# Altium PCB control_pcb.PcbDoc
Units mm, origin at the board's own origin, x right, y up, seen from the top; angles counter-clockwise.
Board outline 130 x 81 mm, 2 copper layers (Top Layer, Bottom Layer); 113 components, 92 nets, 401 pads, 319 vias.
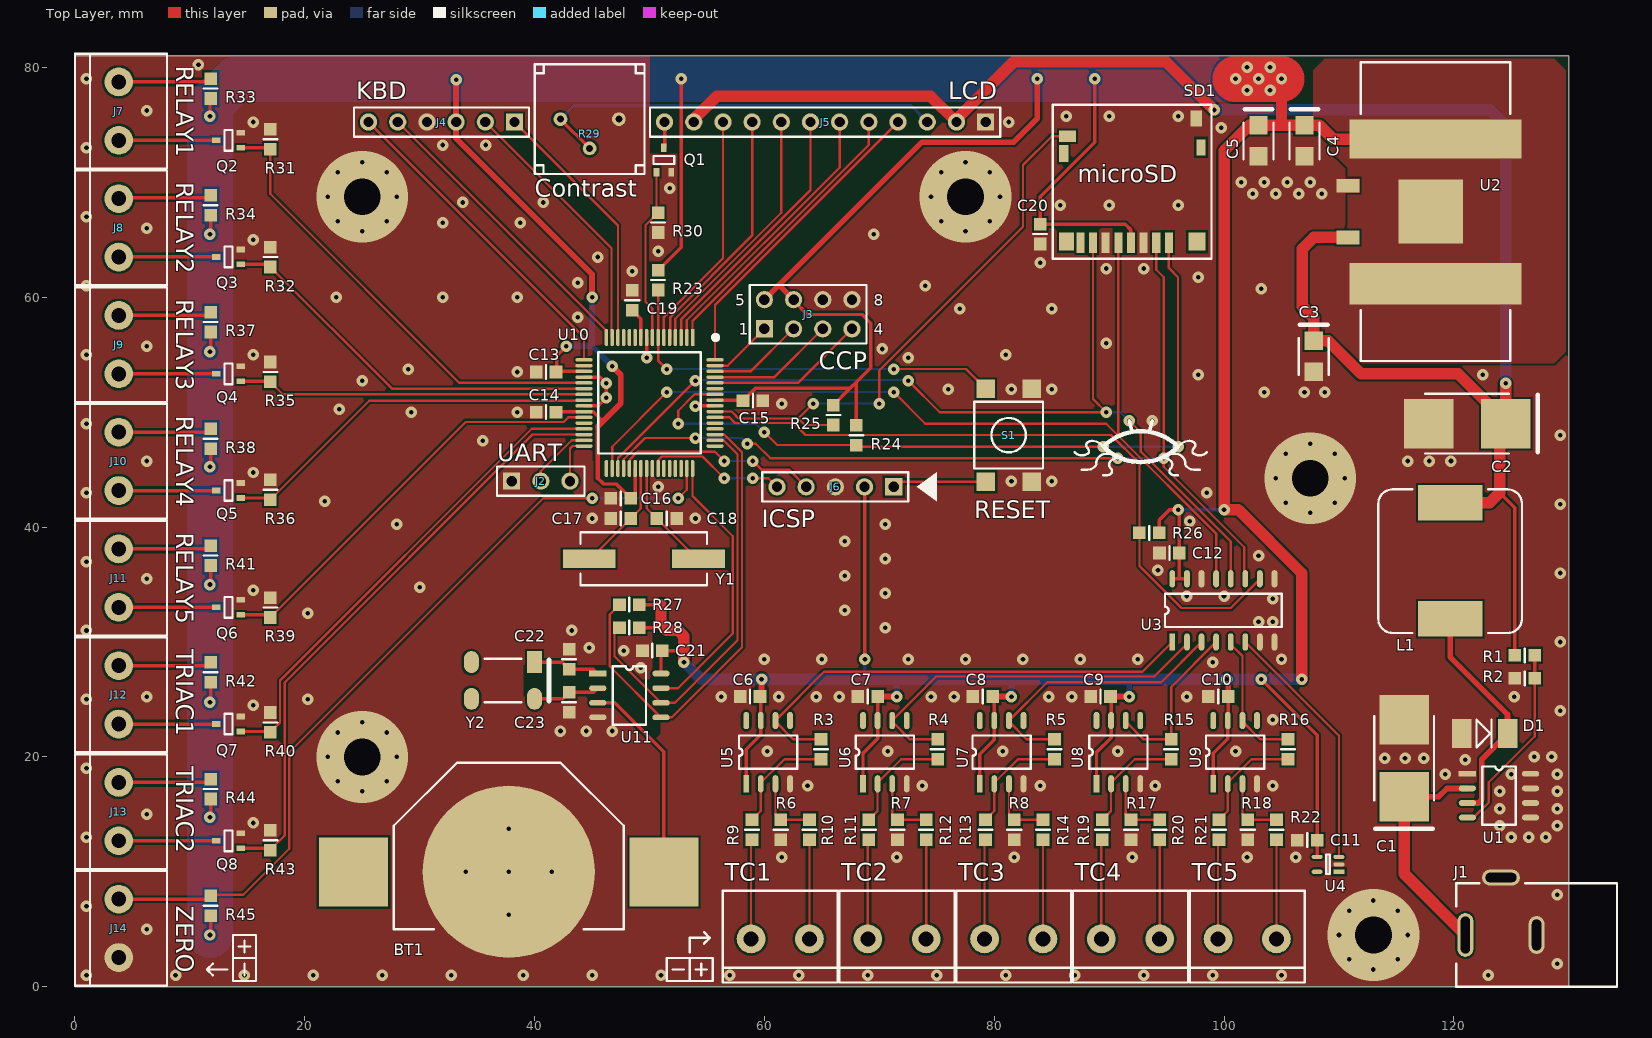
[diagram p0: Top Layer view]
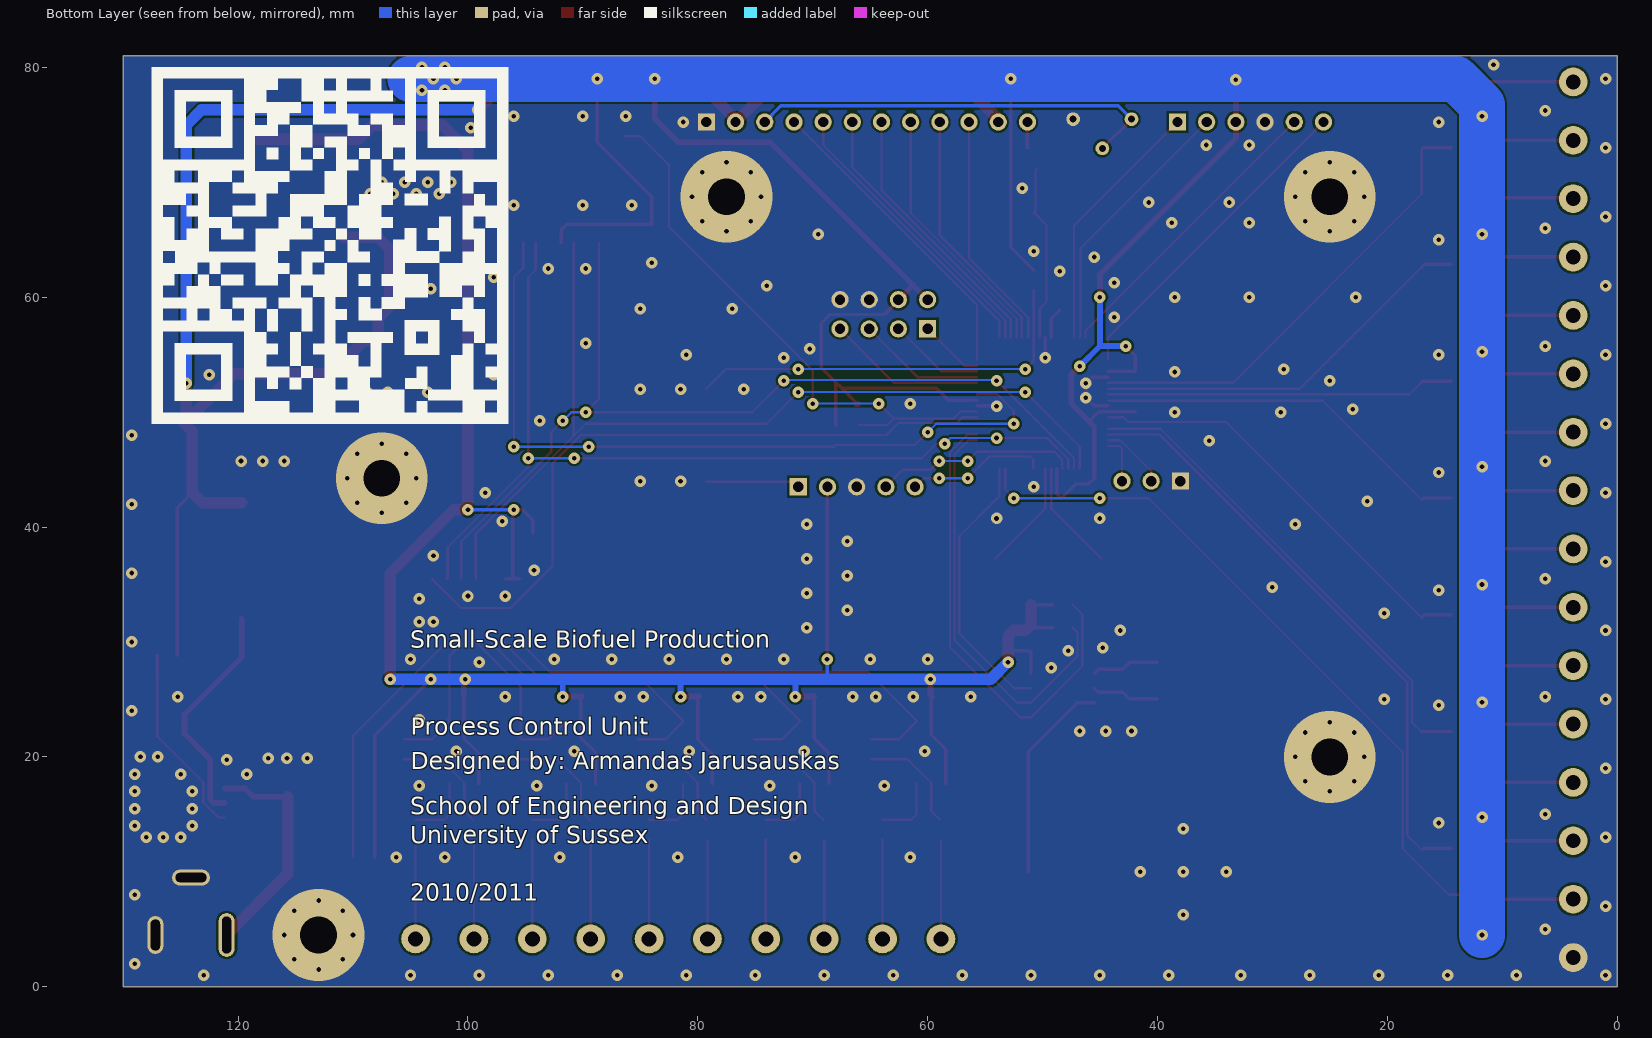
[diagram p1: Bottom Layer view, seen from below]

## Layer stack, top to bottom
Top Layer: signal copper 0.0356
Dielectric: dielectric 0.32, FR-4, Dk 4.8
Bottom Layer: signal copper 0.0356

## Board outline
0,0 0,81 130,81 130,0

## Design rules (kind name [scope] priority, off if disabled: settings)
Clearance [All] p1: gap=0.2
HoleSize [All] p1: absolutevalues=TRUE maxlimit=5 minlimit=0.4 maxpercent=80.000 minpercent=20.000
HoleToHoleClearance [All] p1: gap=0.254 allowstackedmicrovias=FALSE
MinimumAnnularRing [All] p1: minimumring=0.3
MinimumSolderMaskSliver [All] p1: minsoldermaskwidth=0.1
PolygonConnect [All] p1: connectstyle=Direct reliefconductorwidth=0.254 reliefentries=4 polygonreliefangle="90 Angle"
RoomDefinition electrical_interface [InComponentClass('electrical_interface')] p1: confinementstyle=ConfineIn formatcopy=TRUE lockcomponents=FALSE outline -0.25,81.5 -0.25,-0.25 20,-0.25 20,81.5
RoomDefinition power_supply [InComponentClass('power_supply')] p2: confinementstyle=ConfineIn formatcopy=TRUE lockcomponents=FALSE outline 99,81 99,70 105,65 105,43 111,37 111,9 115,5 115,-0.25 134.5,-0.25 134.5,81
RoomDefinition temperature_measurement [InComponentClass('temperature_measurement')] p3: confinementstyle=ConfineIn formatcopy=TRUE lockcomponents=FALSE outline 115,0 115,5 111,9 111,37 105,43 93.5,43 91.5,41 91.5,33 90.5,32 58,32 55,29 55,0
RoutingVias [All] p1: holewidth=0.4 width=1 viastyle="Through Hole" minholewidth=0.4 minwidth=1 maxholewidth=1 maxwidth=3
SilkToSilkClearance [All] p1: silktosilkclearance=0.1
SilkscreenOverComponentPads [All] p1: minsilkscreentomaskgap=0.1
SolderMaskExpansion [All] p1: expansion=0.05
Width [All] p1: maxlimit=10 minlimit=0.1 preferedwidth=0.3
23 further rules are at their usual default settings.

## Classes and differential pairs
component class electrical_interface: J7 J8 J9 J10 J11 J12 J13 J14 Q2 Q3 Q4 Q5 Q6 Q7 Q8 R31 R32 R33 R34 R35 R36 R37 R38 R39 R40 R41 R42 R43 R44 R45
component class mcu: C13 C14 C15 C16 C17 C18 C19 J2 J3 MP1 R23 R24 R25 R26 R27 R28 S1 U10 Y1
component class misc: BT1 C20 C21 C22 C23 J4 J5 J6 Q1 R29 R30 SD1 U11 Y2
component class power_supply: C1 C2 C3 C4 C5 D1 J1 L1 R1 R2 U1 U2
component class temperature_measurement: C6 C7 C8 C9 C10 C11 C12 R3 R4 R5 R6 R7 R8 R9 R10 R11 R12 R13 R14 R15 R16 R17 R18 R19 R20 R21 R22 TC1 TC2 TC3 TC4 TC5 U3 U4 U5 U6 U7 U8 U9

## Components (designator, comment, footprint, x,y, rotation, side; value= is the part's Value field where it differs from the comment)
BT1 "Battery" "Coin Cell" 51.25,10 r180 top
C1 "35V" EIA-7343 115.675,16.529 r90 top
C2 "10V" EIA-7343 124.5,49 r180 top
C3 "6.3V" EIA-3216 107.8,56.21 r270 top
C4 "6.3V" EIA-3216 107,74.96 r270 top
C5 "6.3V" EIA-3216 103,74.96 r270 top
C6 "Cap" 0603 58.75,25.25 r0 top
C7 "Cap" 0603 69,25.25 r0 top
C8 "Cap" 0603 79,25.25 r0 top
C9 "Cap" 0603 89.25,25.25 r0 top
C10 "Cap" 0603 99.5,25.25 r0 top
C11 "Cap" 0603 107.25,12.75 r0 top
C12 "Cap" 0603 95.25,37.75 r0 top
C13 "Cap" 0603 41,53.5 r0 top
C14 "Cap" 0603 41,50 r0 top
C15 "Cap" 0603 59,51 r180 top
C16 "Cap" 0603 47.5,42.5 r0 top
C17 "Cap" 0603 47.5,40.75 r0 top
C18 "Cap" 0603 51.5,40.75 r180 top
C19 "Cap" 0603 48.5,59.75 r270 top
C20 "Cap" 0603 84,65.5 r90 top
C21 "Cap" 0603 50.25,29.25 r0 top
C22 "Cap" 0603 43,28.5 r270 top
C23 "Cap" 0603 43,24.75 r90 top
D1 "Diode" "Diode (SMA)" 120.675,22.029 r0 top
J1 "12V DC" "DC Jack" 121,4.5 r0 top (schematic designator J?)
J2 "UART" HDR1X3 38,44 r0 top
J3 "CCP" HDR2X4_CEN 60,57.25 r0 top
J4 "KBD" HDR1X6 38.25,75.25 r180 top
J5 "LCD" HDR1X12 79.25,75.25 r180 top
J6 "ICSP" HDR1X5 71.25,43.5 r180 top
J7 "RELAY1" "Terminal Block" 3.81,78.74 r270 top
J8 "RELAY2" "Terminal Block" 3.81,68.58 r270 top
J9 "RELAY3" "Terminal Block" 3.81,58.42 r270 top
J10 "RELAY4" "Terminal Block" 3.81,48.26 r270 top
J11 "RELAY5" "Terminal Block" 3.81,38.1 r270 top
J12 "TRIAC1" "Terminal Block" 3.81,27.94 r270 top
J13 "TRIAC2" "Terminal Block" 3.81,17.78 r270 top
J14 "ZERO" "Terminal Block" 3.81,7.62 r270 top
L1 "Inductor" "Inductor EPCOS" 119.675,32.029 r90 top
Q1 "MOSFET-N" SOT323 51.25,73 r0 top
Q2 "MOSFET-N" SOT323 12.31,73.66 r90 top
Q3 "MOSFET-N" SOT323 12.31,63.513 r90 top
Q4 "MOSFET-N" SOT323 12.31,53.34 r90 top
Q5 "MOSFET-N" SOT323 12.31,43.18 r90 top
Q6 "MOSFET-N" SOT323 12.31,33.02 r90 top
Q7 "MOSFET-N" SOT323 12.31,22.86 r90 top
Q8 "MOSFET-N" SOT323 12.31,12.7 r90 top
R1 "1%" 0603 126.175,28.833 r180 top
R2 "1%" 0603 126.175,26.833 r0 top
R3 "0.1%" 0603 64.92,20.66 r270 top
R4 "0.1%" 0603 75.08,20.66 r270 top
R5 "0.1%" 0603 85.24,20.66 r270 top
R6 "0.1%" 0603 61.42,13.66 r90 top
R7 "0.1%" 0603 71.58,13.66 r90 top
R8 "0.1%" 0603 81.74,13.66 r90 top
R9 "0.1%" 0603 58.92,13.66 r90 top
R10 "0.1%" 0603 63.92,13.66 r90 top
R11 "0.1%" 0603 69.08,13.66 r90 top
R12 "0.1%" 0603 74.08,13.66 r90 top
R13 "0.1%" 0603 79.24,13.66 r90 top
R14 "0.1%" 0603 84.24,13.66 r90 top
R15 "0.1%" 0603 95.4,20.66 r270 top
R16 "0.1%" 0603 105.56,20.66 r270 top
R17 "0.1%" 0603 91.9,13.66 r90 top
R18 "0.1%" 0603 102.06,13.66 r90 top
R19 "0.1%" 0603 89.4,13.66 r90 top
R20 "0.1%" 0603 94.4,13.66 r90 top
R21 "0.1%" 0603 99.56,13.66 r90 top
R22 "0.1%" 0603 104.56,13.66 r90 top
R23 "Res2" 0603 50.75,61.5 r90 top
R24 "Res2" 0603 68,48 r90 top
R25 "Res2" 0603 66,49.75 r90 top
R26 "Res2" 0603 93.5,39.5 r0 top
R27 "Res2" 0603 48.25,33.25 r0 top
R28 "Res2" 0603 48.25,31.25 r0 top
R29 "Contrast" Potentiometer 42.25,75.5 r0 top
R30 "Res2" 0603 50.75,66.5 r90 top
R31 "Res2" 0603 17,73.75 r270 top
R32 "Res2" 0603 17,63.5 r270 top
R33 "Res2" 0603 11.81,78.16 r270 top
R34 "Res2" 0603 11.81,68.013 r270 top
R35 "Res2" 0603 17,53.5 r270 top
R36 "Res2" 0603 17,43.25 r270 top
R37 "Res2" 0603 11.81,57.84 r270 top
R38 "Res2" 0603 11.81,47.68 r270 top
R39 "Res2" 0603 17,33 r270 top
R40 "Res2" 0603 17,23 r270 top
R41 "Res2" 0603 11.81,37.52 r270 top
R42 "Res2" 0603 11.81,27.36 r270 top
R43 "Res2" 0603 17,12.75 r270 top
R44 "Res2" 0603 11.81,17.2 r270 top
R45 "Res2" 0603 11.81,7.04 r270 top
S1 "RESET" "Switch 2" 81.25,48 r180 top
SD1 "SDCARD" "microSD connector" 87.5,64.75 r0 top
TC1 "Terminal" "Terminal Block" 58.84,4.16 r0 top
TC2 "Terminal" "Terminal Block" 69,4.16 r0 top
TC3 "Terminal" "Terminal Block" 79.16,4.16 r0 top
TC4 "Terminal" "Terminal Block" 89.32,4.16 r0 top
TC5 "Terminal" "Terminal Block" 99.48,4.16 r0 top
U1 "MIC4680" SO-8 121.175,18.529 r0 top
U2 "AP1117" "TO252 HS" 110.8,69.71 r270 top
U3 "MCP3008" SO-16 95.5,30 r90 top
U4 "MCP9701A" SC-70 110,10 r270 top
U5 "MAX4239" SO-8 58.42,17.66 r90 top
U6 "MAX4239" SO-8 68.58,17.66 r90 top
U7 "MAX4239" SO-8 78.74,17.66 r90 top
U8 "MAX4239" SO-8 88.9,17.66 r90 top
U9 "MAX4239" SO-8 99.06,17.66 r90 top
U10 "PIC18F66K22" TQFP-64 53.75,56.5 r270 top
U11 "M41T81S" SO-8 45.5,27.25 r0 top
Y1 "16MHz" XTAL 44.75,37.25 r0 top
Y2 "32.768kHz" CM200S 40,28.25 r180 top

## Footprints (in the part's own frame and the unit in brackets; to place one, negate y for a bottom-side part, rotate by r counter-clockwise, add the part's x,y. Pads: shape width x height; smd on the part's side, far side on the other; paste and mask are expansions set on the pad)
0603 [mm]
  rect 1.1x1.1 smd: 1(-0.865,0) 2(0.865,0)
  silkscreen extent 0,-0.6 0,0.6
CM200S [mm] "Crystal oscillator package"
  oval 1.3x1.9 smd: 0(5.5,3.2) 0(5.5,0) 2(0,3.2)
  rect 1.3x1.9 smd: 1(0,0)
  silkscreen extent -1.25,-0.3 4.35,3.5
"Coin Cell" [mm] "CR2030 Coin cell retainer"
  rect 6x6 smd: 1(0,0) 1(27,0)
  round 15 smd paste-8: 2(13.5,0)
  silkscreen extent 3.5,-9.5 23.5,5
"DC Jack" [mm] "DC Jack"
  oval 1.4x3.8 hole 0.8 slot 3.2 at 90 deg: 1(0,0)
  oval 1.4x3.3 hole 0.8 slot 2.7 at 90 deg: 2(6.2,0)
  oval 3.3x1.4 hole 0.8 slot 2.7 at 0 deg: 3(3.1,5)
  silkscreen extent -0.8,-4.5 13.2,4.5
"Diode (SMA)" [mm]
  rect 1.7x2.5 smd: 1(0,0) 2(4,0)
  silkscreen extent 1.3,-1.2 2.6,1.2
EIA-3216 [mm]
  rect 1.6x1.6 smd: 1(0,0) 2(2.7,0)
  silkscreen extent -1.4,-1.3 2.95,1.3
EIA-7343 [mm]
  rect 4.3x4.3 smd: 1(0,0) 2(6.7,0)
  silkscreen extent -2.8,-2.6 7,2.6
HDR1X3 [mm] "Connector; Header; 3 Position"
  rect 1.5x1.5 hole 0.9: 1(0,0)
  round 1.5 hole 0.9: 2(2.54,0) 3(5.08,0)
  silkscreen extent -1.27,-1.27 6.35,1.27
HDR1X5 [mm] "Connector; Header; 5 Position"
  rect 1.5x1.5 hole 0.9: 1(0,0)
  round 1.5 hole 0.9: 2(2.54,0) 3(5.08,0) 4(7.62,0) 5(10.16,0)
  silkscreen extent -1.27,-1.27 11.43,1.27
HDR1X6 [mm] "Connector; Header; 6 Position"
  rect 1.5x1.5 hole 0.9: 1(0,0)
  round 1.5 hole 0.9: 2(2.54,0) 3(5.08,0) 4(7.62,0) 5(10.16,0) 6(12.7,0)
  silkscreen extent -1.27,-1.27 13.97,1.27
HDR1X12 [mm] "Connector; Header; 12 Position"
  rect 1.5x1.5 hole 0.9: 1(0,0)
  round 1.5 hole 0.9: 2(2.54,0) 3(5.08,0) 4(7.62,0) 5(10.16,0) 6(12.7,0) 7(15.24,0) 8(17.78,0) 9(20.32,0) 10(22.86,0) 11(25.4,0) 12(27.94,0)
  silkscreen extent -1.27,-1.27 29.21,1.27
HDR2X4_CEN [mm] "Connector; Header; 4x2 Position"
  rect 1.5x1.5 hole 0.9: 1(0,0)
  round 1.5 hole 0.9: 2(2.54,0) 3(5.08,0) 4(7.62,0) 5(0,2.54) 6(2.54,2.54) 7(5.08,2.54) 8(7.62,2.54)
  silkscreen extent -1.27,-1.27 8.89,3.81
"Inductor EPCOS" [mm]
  rect 3.1x5.6 smd: 1(0,0) 2(10.1,0)
  silkscreen extent -1.25,-6.25 11.25,6.25
"microSD connector" [mm] "Push-pull microSD card connector"
  rect 0.8x1.5 smd: 0(-1.45,7.75)
  rect 1.3x1.6 smd: 0(-1.2,0.1)
  rect 1.5x1.6 smd: 0(10.15,0.1)
  rect 0.8x1.4 smd: 0(10.5,8.3)
  rect 0.7x1.8 smd: 1(7.7,0) 2(6.6,0) 3(5.5,0) 4(4.4,0) 5(3.3,0) 6(2.2,0) 7(1.1,0) 8(0,0)
  rect 1.45x1 smd: 9(-1.125,9.25)
  rect 1x1.4 smd: 10(10.1,10.8)
  silkscreen extent -2.4,-1.4 11.4,12
Potentiometer [mm] "Trimmer pot"
  round 1.2 hole 0.6: 1(0,0) 2(5.08,0) 3(2.54,-2.54)
  silkscreen extent -2.24,-4.78 7.32,4.78
SC-70 [mm]
  rect 0.36x0.95 smd: 1(0,0)
  oval 0.36x0.95 smd: 2(-0.65,0) 3(-1.3,0) 4(-1.3,-1.9) 5(0,-1.9)
  silkscreen extent -1.5,-1.1 0.2,-0.8
SO-8 [mm] "8-pin Small Outline Package"
  rect 1.5x0.5 smd: 1(0,0)
  oval 1.5x0.5 smd: 2(0,-1.27) 3(0,-2.54) 4(0,-3.81) 5(5.5,-3.81) 6(5.5,-2.54) 7(5.5,-1.27) 8(5.5,0)
  silkscreen extent 1.3,-4.44 4.2,0.64
SO-16 [mm] "16-pin Small Outline Package"
  rect 1.5x0.5 smd: 1(0,0)
  oval 1.5x0.5 smd: 2(0,-1.27) 3(0,-2.54) 4(0,-3.81) 5(0,-5.08) 6(0,-6.35) 7(0,-7.62) 8(0,-8.89) 9(5.5,-8.89) 10(5.5,-7.62) 11(5.5,-6.35) 12(5.5,-5.08) 13(5.5,-3.81) 14(5.5,-2.54) 15(5.5,-1.27) 16(5.5,0)
  silkscreen extent 1.3,-9.53 4.2,0.64
SOT323 [mm]
  rect 0.5x0.74 smd: 1(0,0) 2(-0.65,-2.1) 3(0.65,-2.1)
  silkscreen extent -0.9,-1.4 0.9,-0.7
"Switch 2" [mm] "Tactile Switch"
  rect 1.6x1.6 smd: 1(-2,4.05) 1(-2,-4.05) 2(2,4.05) 2(2,-4.05)
  silkscreen extent -3,-2.9 3,2.9
"Terminal Block" [mm] "Terminal Block"
  round 2.5 hole 1.3: 1(0,0) 2(5.08,0)
  silkscreen extent -2.46,-3.8 7.54,4.2
"TO252 HS" [mm] "TO252 wth a surface mount heatsink"
  rect 3.4x15 smd: 0(-4.05,7.6)
  rect 3.6x15 smd: 0(8.55,7.6)
  rect 1.2x2 smd: 1(0,0) 3(4.5,0)
  rect 5.6x5.6 smd paste-0.5: 2(2.25,7.2)
  silkscreen extent -10.75,1.1 15.25,14.1
TQFP-64 [mm]
  rect 1.5x0.3 smd: 1(0,0)
  oval 1.5x0.3 smd: 2(0,-0.5) 3(0,-1) 4(0,-1.5) 5(0,-2) 6(0,-2.5) 7(0,-3) 8(0,-3.5) 9(0,-4) 10(0,-4.5) 11(0,-5) 12(0,-5.5) 13(0,-6) 14(0,-6.5) 15(0,-7) 16(0,-7.5) 33(11.4,-7.5) 34(11.4,-7) 35(11.4,-6.5) 36(11.4,-6) 37(11.4,-5.5) 38(11.4,-5) 39(11.4,-4.5) 40(11.4,-4) 41(11.4,-3.5) 42(11.4,-3) 43(11.4,-2.5) 44(11.4,-2) 45(11.4,-1.5) 46(11.4,-1) 47(11.4,-0.5) 48(11.4,0)
  oval 0.3x1.5 smd: 17(1.95,-9.45) 18(2.45,-9.45) 19(2.95,-9.45) 20(3.45,-9.45) 21(3.95,-9.45) 22(4.45,-9.45) 23(4.95,-9.45) 24(5.45,-9.45) 25(5.95,-9.45) 26(6.45,-9.45) 27(6.95,-9.45) 28(7.45,-9.45) 29(7.95,-9.45) 30(8.45,-9.45) 31(8.95,-9.45) 32(9.45,-9.45) 49(9.45,1.95) 50(8.95,1.95) 51(8.45,1.95) 52(7.95,1.95) 53(7.45,1.95) 54(6.95,1.95) 55(6.45,1.95) 56(5.95,1.95) 57(5.45,1.95) 58(4.95,1.95) 59(4.45,1.95) 60(3.95,1.95) 61(3.45,1.95) 62(2.95,1.95) 63(2.45,1.95) 64(1.95,1.95)
  silkscreen extent -0.2,-8.2 10.1,2.2
XTAL [mm] "Low-profile SMD crystal"
  rect 4.6x1.6 smd: 1(0,0) 2(9.5,0)
  silkscreen extent -0.75,-2.3 10.25,2.3

## Part data
BT1: "Multicell Battery"
C1 C2 C3 C4 C5: library part "Cap Pol2", "Polarized Capacitor (Axial)"
C6 C7 C8 C9 C10 C11 C12 C13 C14 C15 C16 C17 C18 C19 C20 C21 C22 C23: "Capacitor"
D1: "Default Diode"
J1: library part PWR2.5, "Low Voltage Power Supply Connector"
J2: library part "Header 3", "Header, 3-Pin"
J3: library part "Header 4X2A", "Header, 4-Pin, Dual row"
J4: library part "Header 6", "Header, 6-Pin"
J5: library part "Header 12", "Header, 12-Pin"
J6: library part "Header 5", "Header, 5-Pin"
J7 J8 J9 J10 J11 J12 J13 J14 TC1 TC2 TC3 TC4 TC5: library part "Header 2", "Header, 2-Pin"
Q1 Q2 Q3 Q4 Q5 Q6 Q7 Q8: "N-Channel MOSFET"
R1 R2 R3 R4 R5 R6 R7 R8 R9 R10 R11 R12 R13 R14 R15 R16 R17 R18 R19 R20 R21 R22: library part Res2, "Resistor"
R23 R24 R25 R26 R27 R28 R30 R31 R32 R33 R34 R35 R36 R37 R38 R39 R40 R41 R42 R43 R44 R45: "Resistor"
R29: library part RPot, "Potentiometer"
S1: library part SW-PB, "Switch"
SD1: library part "SD Card", "SD Card, SPI interface"
U1: "1A 200kHz Buck Regulator"
U2: "Low Dropout Regulator"
U3: "ADC 8-channel 10-bit"
U4: "Low-Power Linear Active Thermistor"
U5 U6 U7 U8 U9: "Ultra-Low Offset/Drift, Low-Noise,  Precision SOT23 Amplifiers"
U10: "PIC microcontroller"
U11: "Serial access real-time clock with alarms"
Y1 Y2: library part XTAL, "Crystal Oscillator"

## Via types
v1: diameter 1, hole 0.4, Top Layer to Bottom Layer, tented both sides, 267 vias
v2: diameter 1, hole 0.4, Top Layer to Bottom Layer, 40 vias
v3: diameter 1, hole 0.4, Top Layer to Bottom Layer, tented bottom, 7 vias
v4: diameter 8, hole 3.2, Top Layer to Bottom Layer, 5 vias

## Nets (pads, with @x,y where several pads share a name; then routed paths per layer and width w, separated by ;. In a path a pad name is that pad's centre, name@x,y a point inside that pad or via, vN(x,y) a via of type N, cw(c..) or ccw(c..) an arc to the next point about the centre after c; other vN are vias at no path point)
3V3: C4.1 C5.1 C6.2 C7.2 C8.2 C9.2 C10.2 C11.2 C12.2 C13.2 C14.2 C15.2 C16.2 C20.2 C21.2 J3.5 J3.6 J4.3 J6.2 R23.2 R24.2 R25.2 R26.2 R27.2 R28.2 R33.2 R34.2 R37.2 R38.2 R41.2 R42.2 R44.2 R45.2 SD1.4 U2.0 U2.2 U3.15 U3.16 U4.4 U5.1 U5.7 U6.1 U6.7 U7.1 U7.7 U8.1 U8.7 U9.1 U9.7 U10.19 U10.26 U10.38 U10.57 U11.8 | length 603.8
  Top Layer w0.3: v1(11.75,75.75) R33.2@11.75,77.235 ; v1@11.81,4.56 R45.2 ; v1@11.81,14.81 R44.2 ; v1@11.81,24.81 R42.2 ; v1@11.81,35.06 R41.2 ; v1@11.81,45.31 R38.2 ; v1@11.81,55.31 R37.2 ; v1@11.81,65.56 R34.2 ; C14.2@41.915,50.05 U10.26 45.107,50.05 45.935,49.222 45.935,49.185 ; v1(42.75,55.75) 41.915,54.915 41.915,53.55 U10.19 ; 45.5,44.25 46,43.75 47.115,43.75 C16.2 48.75,42.885 U10.38 ; R28.2 50.75,31.25 51,31.5 ; R27.2 51,33.25 ; R23.2 52.75,64.365 v1(52.75,79) ; U11.8 51,29.135 C21.2 53,29.25 ; U10.57 C15.2@58.085,51.05 ; C15.2 59.235,52.1 67.485,52.1 ; U5.1 58.42,20.67 59.69,21.94 U5.7 59.69,25.175 C6.2 ; J3.6 62.54,59.71 63.75,58.5 68.5,58.5 69.25,57.75 69.25,53.865 68,52.615 ; R25.2@66,50.824 R25.2 ; R25.2@66.25,50.615 R25.2 ; R24.2 68,52.615 ; U6.1 68.58,20.33 69.85,21.6 U6.7 69.865,23.175 C7.2 ; J6.2 68.75,43.46 v1(68.75,28.5) ; U7.1 78.74,20.24 80,21.5 80,23.15 80,25.115 C8.2 ; v1(88.75,79) 88.75,73.5 84,68.75 C20.2 91.385,66.365 91.9,65.85 SD1.4 ; U8.1 88.9,20.4 90.17,21.67 U8.7 90.17,25.195 C9.2 ; R26.2 94.365,40.615 95.25,41.5 v1(96,41.5) ; U3.16 96.126,35.5 ; v1@96.115,41.385 C12.2 96.115,35.511 96.126,35.5 ; U3.15 96.126,35.5 ; U9.1 99.06,20.31 100.33,21.58 U9.7 100.365,23.195 C10.2 ; 100,78 v1(101,79) ; v1(103.25,26.75) 108.115,21.885 C11.2 108.115,11.315 U4.4 ; R25.2 67.485,52.1 ; 67.485,52.1 68,52.615
  Top Layer w0.4: 45.5,44.25 45.5,48.75 ; U7.7@80,23.15 U7.7
  Top Layer w0.5: v1(33.17,78.92) J4.3 33.17,73.83 45,62 v1(45,60) ; 45.5,48.75 45.935,49.185 47.5,50.75 47.5,53.25 v1(46.75,54) ; C6.2 59.75,25.385 v1(59.75,26.75) v1@59.615,26.615 ; J3.5 61.269,61.059 ; J3.6 61.271,61.059 61.269,61.059 ; C7.2 v1(71.5,25.25) ; C8.2 v1(81.5,25.25) ; v1(83.75,79) 83.75,75.553 81.697,73.5 73.71,73.5 61.269,61.059 ; C9.2 v1(91.75,25.25) ; v1(100.25,26.75) 100.365,26.635 C10.2
  Top Layer w1: 51,33.25 51,31.5 51.5,31 52.5,31 53,30.5 53,29.25 v1(53,28.25) ; v1(105,79) 105,74.96 ; v1(106.75,26.75) 106.75,36 101.25,41.5 v1(100,41.5) 100,72.75 102.21,74.96 C5.1 105,74.96 ; U2.0@111.7,73.76 U2.0@118.4,73.76 ; U2.0@118.39,73.75 109.5,73.75 108.29,74.96 C4.1 105,74.96
  Top Layer w4: v1(101,79) v1(105,79)
  Bottom Layer w0.3: 68.75,26.75 v1(68.75,28.5) ; v1(96,41.5) v1(100,41.5)
  Bottom Layer w0.5: v1(42.75,55.75) 45,55.75 ; v1(45,60) 45,55.75 ; v1(46.75,54) 45,55.75 ; v1(71.5,25.25) 71.5,26.75 ; v1(81.5,25.25) 81.5,26.75 ; v1(91.75,25.25) 91.75,26.75
  Bottom Layer w1: v1(53,28.25) 54.5,26.75 v1(59.75,26.75) 68.75,26.75 71.5,26.75 81.5,26.75 91.75,26.75 v1(100.25,26.75) v1(103.25,26.75) v1(106.75,26.75)
  Bottom Layer w4: v1(11.75,4.5) 11.75,76.75 14,79 v1(105,79)
  other v1: 11.75,14.75 11.75,24.75 11.75,35 11.75,45.25 11.75,55.25 11.75,65.5 102,78 104,78 103,79 102,80 104,80
5V: C2.1 C3.1 J5.2 J5.11 L1.2 R1.2 U2.3 | length 161.2
  Top Layer w0.3: 124,43 125.31,41.69 R1.2
  Top Layer w1: J5.11@53.85,75.5 55.85,77.5 74.46,77.5 J5.2 76.71,75.5 81.71,80.5 94.95,80.5 v1(99.15,76.3) ; U2.3 107.8,65.21 106.8,64.21 106.8,59.21 107.8,58.21 C3.1 109.05,56.21 111.92,53.34 120.364,53.34 C2.1@124.5,49.204 ; L1.2 123.129,42.129 124,43 124,48.354 124.675,49.029 C2.1@124.5,49.204 ; v1(124.5,52.5) C2.1@124.5,49.204
  Bottom Layer w1: v1(99.15,76.3) 123.2,76.3 124.5,75 v1(124.5,52.5)
BACKLIGHT-: J5.12 Q1.1 | length 2.3
  Top Layer w0.3: Q1.1 51.31,73.06 J5.12
CONTRAST: J5.3 R29.1 R29.3 | length 36.6
  Top Layer w0.3: R29.1 R29.3
  Bottom Layer w0.3: R29.1 43.4,76.65 72.77,76.65 J5.3
GND: BT1.2 C1.2 C2.2 C3.2 C4.2 C5.2 C6.1 C7.1 C8.1 C9.1 C10.1 C11.1 C12.1 C13.1 C14.1 C15.1 C16.1 C17.1 C18.1 C19.1 C20.1 C21.1 C22.1 C23.1 D1.1 J1.2 J1.3 J2.1 J3.7 J3.8 J4.4 J5.1 J6.3 J14.2 Q1.3 Q2.3 Q3.3 Q4.3 Q5.3 Q6.3 Q7.3 Q8.3 R2.1 R6.1 R7.1 R8.1 R17.1 R18.1 R29.2 R30.1 R31.1 R32.1 R35.1 R36.1 R39.1 R40.1 R43.1 S1.1 SD1.3 SD1.6 SD1.10 U1.1 U1.5 U1.6 U1.7 U1.8 U2.1 U3.7 U3.8 U3.9 U3.14 U4.2 U5.4 U6.4 U7.4 U8.4 U9.4 U10.9 U10.18 U10.20 U10.25 U10.41 U10.56 U11.4 | length 9.1
  Top Layer w0.3: U10.25 45.55,50.55 v1(46.25,51.25) v1(46.25,52.5) 45.7,53.05 U10.20 ; v1(49.75,54.75) U10.9 ; v1(54,50.5) 54.05,50.55 U10.56
  other v1: 1,1 8.75,1 14.75,1 20.75,1 26.75,1 32.75,1 39,1 45,1 51,1 57,1 63,1 69,1 75,1 81,1 87,1 93,1 99,1 105,1 123,1 129,2 6.25,5 1,7 129,8 61.5,11.25 71.5,11.25 81.75,11.25 92,11.25 102,11.25 106.25,11.25 1,13 125,13 126.5,13 128,13 124,14 129,14 15.5,14.25 6.25,15 124,15.5 129,15.5 124,17 129,17 63.75,17.5 73.75,17.5 84,17.5 94,17.5 104.25,17.5 119.25,18.5 125,18.5 129,18.5 1,19 121,19.75 114,19.875 115.75,19.875 117.375,19.875 127,20 128.5,20 60.25,20.5 70.75,20.5 80.75,20.5 90.75,20.5 101,20.5 42.25,22.25 44.5,22.25 46.75,22.25 104.25,23.25 129.25,24 15.5,24.5 1,25 20.25,25 6.25,25.25 56.25,25.25 61.25,25.25 64.5,25.25 66.5,25.25 74.5,25.25 76.5,25.25 84.75,25.25 86.75,25.25 96.75,25.25 125.25,25.25 49.25,27.75 99,28.25 60,28.5 65,28.5 72.5,28.5 77.5,28.5 82.5,28.5 87.5,28.5 92.5,28.5 105,28.5 47.75,29.25 44.75,29.5 129.25,30 1,31 43.25,31 70.5,31.25 103,31.75 104.25,31.75 20.25,32.5 67,32.75 104.25,33.75 96.75,34 100,34 70.5,34.25 15.5,34.5 30,34.75 6.25,35.5 67,35.75 129.25,36 94.25,36.25 1,37 70.5,37.25 103,37.5 67,38.75 28,40.25 70.5,40.25 97,40.5 45,40.75 54,40.75 129.25,42 21.75,42.25 1,43 98.5,43 50.75,43.5 81.5,44 85,44 15.5,44.75 6.25,45.75 116,45.75 117.875,45.75 119.75,45.75 35.5,47.5 129.25,48 1,49 29.25,50 38.5,50 23,50.25 61.5,50.75 103.5,51.75 107,51.75 108.75,51.75 76,52 81.5,52 85,52 25,52.75 97.75,53.25 122.5,53.25 38.5,53.5 29,53.75 72.5,54.75 1,55 15.5,55 81,55 70.25,55.5 6.25,55.75 89.75,56 43.75,58.25 77,59 85,59 22.75,60 32,60 38.5,60 103.25,60.75 1,61 74,61 43.75,61.25 97.75,61.75 48.5,62.25 89.75,62.5 93,62.5 84,63 45.5,63.5 50.75,64 15.5,65 69.5,65.5 6.25,66 32,66.5 38.75,66.5 1,67 85.75,68 90,68 96,68 33.75,68.25 40.75,68.25 102.5,69 104.5,69 106.5,69 108.5,69 51.75,69.5 101.5,70 103.5,70 105.5,70 107.5,70 1,73 32,73.25 35.75,73.25 99.75,74.75 15.5,75.25 81.25,75.25 86.25,75.75 90,75.75 96,75.75 6.25,76.25 1,79 10.75,80.25
  other v2: 113,1.5 110.88,2.38 115.12,2.38 110,4.5 116,4.5 110.88,6.62 115.12,6.62 113,7.5 25,17 22.88,17.88 27.12,17.88 22,20 28,20 22.88,22.12 27.12,22.12 25,23 107.5,41.25 105.38,42.13 109.62,42.13 104.5,44.25 110.5,44.25 105.38,46.37 109.62,46.37 107.5,47.25 25,65.75 77.5,65.75 22.88,66.63 27.12,66.63 75.38,66.63 79.62,66.63 22,68.75 28,68.75 74.5,68.75 80.5,68.75 22.88,70.87 27.12,70.87 75.38,70.87 79.62,70.87 25,71.75 77.5,71.75
  other v3: 37.75,6.25 34,10 37.75,10 41.5,10 37.75,13.75 93.75,49.25
  other v4: 113,4.5 25,20 107.5,44.25 25,68.75 77.5,68.75
NetC1_1: C1.1 J1.1 U1.2 | length 20
  Top Layer w0.5: C1.1 118.675,16.529 119.405,17.259 U1.2
  Top Layer w1: C1.1 115.675,9.825 J1.1
NetC17_2: C17.2 U10.39 Y1.1 | length 9.7
  Top Layer w0.2: Y1.1@44.865,37.25 C17.2 49.25,41.635 U10.39
NetC18_2: C18.2 U10.40 Y1.2 | length 9.7
  Top Layer w0.2: U10.40 49.75,41.635 C18.2 Y1.2@54.135,37.25
NetC19_2: C19.2 U10.10 | length 2.7
  Top Layer w0.3: C19.2 49.25,58.135 U10.10
NetD1_2: D1.2 L1.1 U1.3 | length 20.1
  Top Layer w0.5: L1.1 119.675,28.691 124.675,23.691 D1.2 122.429,19.783 122.429,16.283 122.135,15.989 U1.3
NetJ2_2: J2.2 U10.31 | length 5.7
  Top Layer w0.2: J2.2 40.54,44.856 43.234,47.55 U10.31
NetJ2_3: J2.3 U10.32 | length 4.1
  Top Layer w0.2: J2.3 43.08,46.83 43.3,47.05 U10.32
NetJ3_1: J3.1 U10.63 | length 5.6
  Top Layer w0.2: U10.63 56.8,54.05 J3.1
NetJ3_2: J3.2 U10.62 | length 8.4
  Top Layer w0.2: U10.62 58.8,53.55 62.5,57.25 J3.2
NetJ3_3: J3.3 U10.61 | length 11.1
  Top Layer w0.2: U10.61 60.88,53.05 J3.3
NetJ3_4: J3.4 U10.60 | length 13.9
  Top Layer w0.2: U10.60 62.92,52.55 J3.4
NetJ4_1: J4.1 U10.14 | length 22.5
  Top Layer w0.2: J4.1 47.25,66.25 U10.14
NetJ4_2: J4.2 U10.15 | length 23.3
  Top Layer w0.2: J4.2 46.7,64.26 46.7,56.55 U10.15
NetJ4_5: J4.5 U10.16 | length 26.3
  Top Layer w0.2: J4.5 46.25,57.09 U10.16
NetJ4_6: J4.6 U10.17 | length 28.5
  Top Layer w0.2: J4.6 44.3,56.5 U10.17
NetJ5_4: J5.4 U10.64 | length 27.3
  Top Layer w0.2: U10.64 55.7,59.32 J5.4
NetJ5_5: J5.5 U10.1 | length 25.1
  Top Layer w0.2: U10.1 53.75,57.936 69.09,73.276 J5.5
NetJ5_6: J5.6 U10.2 | length 24.3
  Top Layer w0.2: U10.2 53.25,58.001 66.55,71.301 J5.6
NetJ5_7: J5.7 U10.3 | length 23.4
  Top Layer w0.2: U10.3 52.75,58.067 64.01,69.327 J5.7
NetJ5_8: J5.8 U10.4 | length 22.6
  Top Layer w0.2: U10.4 52.25,58.133 61.47,67.353 J5.8
NetJ5_9: J5.9 U10.5 | length 21.7
  Top Layer w0.2: U10.5 51.8,56.55 51.8,58.248 58.93,65.378 J5.9
NetJ5_10: J5.10 U10.6 | length 20.9
  Top Layer w0.2: U10.6 51.25,58.264 56.39,63.404 J5.10
NetJ6_1: J6.1 R23.1 S1.2 U10.7 | length 43.8
  Top Layer w0.2: R23.1 U10.7 50.75,54.5 v1(51.5,53.75) ; J6.1 71.7,43.95 S1.2@79.25,43.95 ; v1(71.25,53.75) 77.55,53.75 S1.2@79.25,52.05
  Bottom Layer w0.2: v1(51.5,53.75) v1(71.25,53.75)
NetJ6_4: J6.4 U10.37 | length 17.7
  Top Layer w0.2: U10.37 48.3,45.15 48.3,45.886 48.964,46.55 55.7,46.55 v1(56.5,45.75) ; v1(59,45.75) 59.75,45 62.13,45 J6.4
  Bottom Layer w0.2: v1(56.5,45.75) v1(59,45.75)
NetJ6_5: J6.5 U10.42 | length 12.3
  Top Layer w0.2: U10.42 50.8,45.15 50.8,45.886 51.064,46.15 54.6,46.15 v1(56.5,44.25) ; v1(59,44.25) 60.34,44.25 J6.5
  Bottom Layer w0.2: v1(56.5,44.25) v1(59,44.25)
NetJ7_1: J7.1 R33.1 | length 8.1
  Top Layer w0.3: J7.1 11.525,78.74 R33.1
NetJ7_2: J7.2 Q2.1 | length 8.5
  Top Layer w0.3: J7.2 Q2.1
NetJ8_1: J8.1 R34.1 | length 8.1
  Top Layer w0.3: J8.1@3.62,68.673 R34.1@11.322,68.673 ; R34.1@11.512,68.58 R34.1
NetJ8_2: J8.2 Q3.1 | length 8.5
  Top Layer w0.3: J8.2@3.823,63.513 Q3.1
NetJ9_1: J9.1 R37.1 | length 8.1
  Top Layer w0.3: J9.1 11.525,58.42 R37.1
NetJ9_2: J9.2 Q4.1 | length 8.5
  Top Layer w0.3: J9.2 Q4.1
NetJ10_1: J10.1 R38.1 | length 8.1
  Top Layer w0.3: J10.1 11.525,48.26 R38.1
NetJ10_2: J10.2 Q5.1 | length 8.5
  Top Layer w0.3: J10.2 Q5.1
NetJ11_1: J11.1 R41.1 | length 8.1
  Top Layer w0.3: J11.1 11.525,38.1 R41.1
NetJ11_2: J11.2 Q6.1 | length 8.5
  Top Layer w0.3: J11.2 Q6.1
NetJ12_1: J12.1 R42.1 | length 8.1
  Top Layer w0.3: J12.1 11.525,27.94 R42.1
NetJ12_2: J12.2 Q7.1 | length 8.5
  Top Layer w0.3: J12.2 Q7.1
NetJ13_1: J13.1 R44.1 | length 8.1
  Top Layer w0.3: J13.1 11.525,17.78 R44.1
NetJ13_2: J13.2 Q8.1 | length 8.5
  Top Layer w0.3: J13.2 Q8.1
NetJ14_1: J14.1 R45.1 U10.47 | length 71.1
  Top Layer w0.2: R45.1 11.905,8 14.639,8 18.65,12.011 18.65,20.4 40.75,42.5 v1(45,42.5) ; v1(52.5,42.5) 53.25,43.25 U10.47 ; U10.47@53.2,45.05 U10.47 ; U10.47@53.3,45.05 U10.47
  Top Layer w0.3: J14.1 11.525,7.62 R45.1
  Bottom Layer w0.2: v1(45,42.5) v1(52.5,42.5)
NetQ1_2: Q1.2 R30.2 U10.8 | length 15.3
  Top Layer w0.2: U10.8 50.25,59 49.65,59.6 49.65,66.265 R30.2 50.6,67.515 Q1.2 ; Q1.2@50.5,71.05 Q1.2@50.6,71.15
NetQ2_2: Q2.2 R31.2 U10.21 | length 40.5
  Top Layer w0.2: R31.2 17,69 33.45,52.55 U10.21
  Top Layer w0.3: Q2.2 R31.2@16.875,73.01
NetQ3_2: Q3.2 R32.2 U10.22 | length 34.4
  Top Layer w0.2: R32.2 27.585,52.05 U10.22
  Top Layer w0.3: Q3.2 16.772,62.863 R32.2
NetQ4_2: Q4.2 R35.2 U10.23 | length 30.3
  Top Layer w0.2: R35.2 18.085,51.55 U10.23
  Top Layer w0.3: Q4.2 R35.2@16.945,52.69
NetQ5_2: Q5.2 R36.2 U10.24 | length 33.3
  Top Layer w0.2: R36.2 25.615,51 U10.24@44.25,51
  Top Layer w0.3: Q5.2 R36.2@16.855,42.53
NetQ6_2: Q6.2 R39.2 U10.27 | length 37.2
  Top Layer w0.2: R39.2 34.015,49.15 42.539,49.15 42.939,49.55 U10.27
  Top Layer w0.3: Q6.2 16.765,32.37 R39.2
NetQ7_2: Q7.2 R40.2 U10.29 | length 42.9
  Top Layer w0.2: R40.2 17.85,22.985 17.85,26.64 39.76,48.55 U10.29
  Top Layer w0.3: Q7.2 R40.2@16.925,22.21
NetQ8_2: Q8.2 R43.2 U10.30 | length 52.5
  Top Layer w0.2: R43.2@17,11.915 18.25,13.165 18.25,26.474 39.826,48.05 U10.30
  Top Layer w0.3: Q8.2 R43.2@16.835,12.05
NetR1_1: R1.1 R2.2 U1.4 | length 16.9
  Top Layer w0.2: U1.4 121.719,14.719 123.033,16.033 123.033,17.787 127.04,21.794 R2.2
  Top Layer w0.3: R2.2 R1.1
NetR3_2: R3.2 R9.2 U5.2 | length 9.5
  Top Layer w0.2: R9.2 59.69,15.295 U5.2 ; U5.2@59.69,17.744 61.741,19.795 R3.2
NetR4_2: R4.2 R11.2 U6.2 | length 9.5
  Top Layer w0.2: R11.2 69.85,15.295 U6.2 ; U6.2@69.85,17.744 71.901,19.795 R4.2
NetR5_2: R5.2 R13.2 U7.2 | length 9.5
  Top Layer w0.2: R13.2 80.01,15.295 U7.2 ; U7.2@80.01,17.744 82.061,19.795 R5.2
NetR6_2: R6.2 R10.2 U5.3 | length 5.8
  Top Layer w0.2: U5.3 60.96,14.985 R6.2 R10.2
NetR7_2: R7.2 R12.2 U6.3 | length 5.8
  Top Layer w0.2: U6.3 71.12,14.985 R7.2 R12.2
NetR8_2: R8.2 R14.2 U7.3 | length 5.8
  Top Layer w0.2: U7.3 81.28,14.985 R8.2 R14.2
NetR9_1: R9.1 TC1.1 | length 8.6
  Top Layer w0.2: TC1.1 R9.1@58.84,12.715
NetR10_1: R10.1 TC1.2 | length 8.6
  Top Layer w0.2: TC1.2 R10.1
NetR11_1: R11.1 TC2.1 | length 8.6
  Top Layer w0.2: TC2.1 R11.1@69,12.715
NetR12_1: R12.1 TC2.2 | length 8.6
  Top Layer w0.2: TC2.2 R12.1
NetR13_1: R13.1 TC3.1 | length 8.6
  Top Layer w0.2: TC3.1 R13.1@79.16,12.715
NetR14_1: R14.1 TC3.2 | length 8.6
  Top Layer w0.2: TC3.2 R14.1
NetR15_2: R15.2 R19.2 U8.2 | length 9.5
  Top Layer w0.2: R19.2 90.17,15.295 U8.2 ; U8.2@90.17,17.744 92.221,19.795 R15.2
NetR16_2: R16.2 R21.2 U9.2 | length 9.5
  Top Layer w0.2: R21.2 100.33,15.295 U9.2 ; U9.2@100.33,17.744 102.381,19.795 R16.2
NetR17_2: R17.2 R20.2 U8.3 | length 5.8
  Top Layer w0.2: U8.3 91.44,14.985 R17.2 R20.2
NetR18_2: R18.2 R22.2 U9.3 | length 5.8
  Top Layer w0.2: U9.3 101.6,14.985 R18.2 R22.2
NetR19_1: R19.1 TC4.1 | length 8.6
  Top Layer w0.2: TC4.1 R19.1@89.32,12.715
NetR20_1: R20.1 TC4.2 | length 8.6
  Top Layer w0.2: TC4.2 R20.1
NetR21_1: R21.1 TC5.1 | length 8.6
  Top Layer w0.2: TC5.1 R21.1@99.48,12.715
NetR22_1: R22.1 TC5.2 | length 8.6
  Top Layer w0.2: TC5.2 R22.1
NetR24_1: R24.1 SD1.1 U10.58 | length 67.5
  Top Layer w0.2: v1(52.5,49) 52.5,50.131 53.919,51.55 U10.58 U10.58@55.65,51.5 ; v1(60,48.25) 61.115,47.135 R24.1 68.135,47 v1(89.5,47) ; SD1.1 95.2,62.55 96,61.75 v1(96,47)
  Bottom Layer w0.2: v1(52.5,49) 59.25,49 v1(60,48.25) v1@59.95,48.3 ; v1(89.5,47) v1(96,47)
NetR25_1: R25.1 SD1.9 U10.55 | length 49.3
  Top Layer w0.2: U10.55 57.15,50.05 57.75,49.45 62.95,49.45 ; v1(64.25,50.75) 62.95,49.45 ; R25.1@65.865,48.885 R25.1 63.515,48.885 62.95,49.45 ; v1(70,50.75) 70,53.631 82.5,66.131 82.5,71.5 85,74 SD1.9
  Bottom Layer w0.2: v1(64.25,50.75) v1(70,50.75)
NetR26_1: R26.1 U3.10 U10.54 | length 60.7
  Top Layer w0.2: U10.54@55.75,49.5 U10.54 56.95,49.55 57.45,49.05 62.55,49.05 63.585,48.015 90.169,48.015 92.635,45.549 R26.1 92.635,36.615 96.3,32.95 100.578,32.95 103.12,35.492 U3.10
NetR27_1: R27.1 U10.51 U11.5 | length 41.5
  Top Layer w0.2: R27.1 46.535,32.4 46.535,27.897 50.992,23.44 U11.5 ; U11.5@51.008,23.44 U11.5 ; U10.51 56.502,48.05 58.05,46.502 58.05,29.55 51.94,23.44 U11.5
NetR28_1: R28.1 U10.50 U11.6 | length 36
  Top Layer w0.2: R28.1 46.95,30.815 46.95,28.752 50.992,24.71 U11.6 ; U11.6@51.008,24.71 U11.6 ; U10.50 56.436,47.55 57.65,46.336 57.65,30.15 52.21,24.71 U11.6
NetSD1_2: SD1.2 U3.11 U10.36 | length 81.8
  Top Layer w0.2: U10.36 47.75,45.902 49.598,47.75 v1(54,47.75) ; v1(58.5,47.25) 59.25,47.25 60.5,46 v1(90.75,46) ; SD1.2 94.1,62.4 94.75,61.75 v1(94.75,46) 94.75,45.25 101.75,38.25 101.75,35.6 U3.11
  Bottom Layer w0.2: v1(54,47.75) 58,47.75 v1(58.5,47.25) ; v1(90.75,46) v1(94.75,46)
NetSD1_5: SD1.5 U3.13 U10.34 | length 82.3
  Top Layer w0.2: U10.34 46.75,47 v1(51.5,51.75) ; v1(71.25,51.75) 74,49 89.75,49 90.8,47.95 ; SD1.5 90.8,47.95 ; U3.13 99.31,39.44 90.8,47.95
  Bottom Layer w0.2: v1(51.5,51.75) v1(71.25,51.75)
NetSD1_7: SD1.7 U3.12 U10.35 | length 82.4
  Top Layer w0.2: U10.35@47.3,45.15 U10.35 47.25,46 v1(54,52.75) ; v1(72.5,52.75) 75.25,50 v1(89.75,50) 88.6,51.15 SD1.7 ; v3(91.75,49.25) 92.75,48.25 92.75,46.566 100.58,38.736 U3.12 U3.12@100.58,35.492
  Bottom Layer w0.2: v1(54,52.75) 54.05,52.8 72.45,52.8 v1(72.5,52.75) ; v1(89.75,50) 91,50 v3(91.75,49.25)
NetU3_6: U3.6 U4.3 | length 22.1
  Top Layer w0.2: U3.6 101.85,29.992 110,21.842 U4.3
NetU10_48: U10.48 U11.7 | length 24
  Top Layer w0.2: U11.7@51.008,25.98 U11.7 52.48,25.98 57.25,30.75 57.25,39.197 53.75,42.697 U10.48
RTC_XTAL1: C22.2 U11.1 Y2.1 | length 5.9
  Top Layer w0.3: Y2.1 42.385,28.25 C22.2 45.115,27.635 U11.1
RTC_XTAL2: C23.2 U11.2 Y2.2 | length 5.9
  Top Layer w0.3: Y2.2 42.435,25.05 C23.2 45.135,25.615 U11.2
TC_1: R3.1 U3.1 U5.6 | length 42
  Top Layer w0.2: U5.6@60.96,23.076 62.511,21.525 R3.1 ; U5.6 60.96,23.168 65.192,27.4 92.9,27.4 U3.1
TC_2: R4.1 U3.2 U6.6 | length 33.2
  Top Layer w0.2: U6.6@71.12,23.076 72.671,21.525 R4.1 ; U6.6 71.12,23.168 74.952,27 93.924,27 96.77,29.846 U3.2
TC_3: R5.1 U3.3 U7.6 | length 24.2
  Top Layer w0.2: U7.6@81.28,23.076 82.831,21.525 R5.1 ; U7.6 81.28,23.168 84.612,26.5 94.548,26.5 98.04,29.992 U3.3
TC_4: R15.1 U3.4 U8.6 | length 14.7
  Top Layer w0.2: U8.6@91.44,23.076 92.991,21.525 R15.1 95.4,26.082 99.31,29.992 U3.4 ; U8.6 U8.6@91.44,23.168
TC_5: R16.1 U3.5 U9.6 | length 12.1
  Top Layer w0.2: U3.5@100.58,29.992 U3.5 100.58,29.792 101.6,28.772 U9.6 U9.6@101.75,23.31 ; U9.6@101.6,23.076 103.151,21.525 R16.1
VBATT: BT1.1 U11.3 | length 18
  Top Layer w0.3: U11.3 46.992,24.71 51.25,20.452 BT1.1@51.25,10
pads on no net: SD1.0 SD1.8 U4.1 U4.5 U5.5 U5.8 U6.5 U6.8 U7.5 U7.8 U8.5 U8.8 U9.5 U9.8 U10.11 U10.12 U10.13 U10.28 U10.33 U10.43 U10.44 U10.45 U10.46 U10.49 U10.52 U10.53 U10.59 Y2.0

## Polygon pours and split planes (outlines as drawn)
GND on Top Layer "TopGNDPoly" (solid, remove dead copper, pour order 1002): 130,0 130,81 0,81 0,0
3V3 on Top Layer "LDOHeatsink" (solid, pour order 1000): 129.75,79.75 128.75,80.75 108.75,80.75 107.75,79.75 107.75,74.25 110.75,71.25 110.75,66.25 109.75,65.25 107.75,65.25 106.75,64.25 106.75,56.25 107.75,55.25 110.75,55.25 111.75,54.25 128.75,54.25 129.75,55.25
GND on Bottom Layer "BottomGNDPoly" (solid, remove dead copper, pour order 1001): 0,0 0,81 130,81 130,0

## Other copper
Top Layer:
  pour cut-out: 39,28 39,25.25 45.25,25.25 46.25,24.25 47.25,24.25 49.5,22 50.25,21.25 51,22 51,31 50.25,31 50.25,27 50,26.75 49.25,26.75 48,28
  pour cut-out: 69,72.5 70.75,74.25 74.5,74.25 81.25,81 50.01,81 50.01,72.5
  pour cut-out: 45,55.75 55,55.75 55,45.75 45,45.75

## Silkscreen, mask and mechanical layers (free items; w line width, h text height)
Top Overlay:
  region: 73.25,43.5 75,44.75 75,42.25
  lines w0.2: 12,1 11.5,1.5 ; 12,2 11.5,1.5 ; 13.25,1.5 11.5,1.5 ; 13.75,2.5 15.75,2.5 ; 14.25,3.5 15.25,3.5 ; 14.75,1 14.75,2 ; 14.75,3 14.75,4 ; 52,1.5 53,1.5 ; 53.5,2.5 53.5,0.5 ; 53.5,3 53.5,4.25 55.25,4.25 ; 54,1.5 55,1.5 ; 54.5,1 54.5,2 ; 54.75,3.75 55.25,4.25 ; 54.75,4.75 55.25,4.25 ; 87,46.5 ccw(c87.604,47.104) 87.604,46.25 87.689,46.25 ccw(c87.689,47) 88.22,46.47 ccw(c88.146,46.543) 88.25,46.543 ccw(c87.75,46.543) 88.104,46.896 cw(c88.354,47.146) 88,47.146 cw(c88.25,47.146) 88.073,47.323 cw(c88.5,46.896) 88.5,47.5 cw(c88.5,46.293) 89.354,47.146 89.5,47 ; 87.625,45 88.116,45 ccw(c88.116,45.927) 88.771,45.271 ccw(c88.521,45.521) 88.875,45.521 cw(c89.729,45.521) 89.125,46.125 cw(c89.729,45.521) 89.729,46.375 90.25,46.375 ; 89.5,44.5 89.771,44.5 ccw(c89.771,45.052) 90.162,44.662 ccw(c89.948,44.875) 90.25,44.875 ccw(c89.948,44.875) 90.162,45.088 90.125,45.125 cw(c90.427,45.427) 90,45.427 90,45.448 cw(c90.427,45.448) 90.125,45.75 cw(c90.729,45.146) 90.729,46 90.75,46 ; 94.75,46 94.771,46 cw(c94.771,45.146) 95.375,45.75 cw(c95.073,45.448) 95.5,45.448 95.5,45.427 cw(c95.073,45.427) 95.375,45.125 95.338,45.088 ccw(c95.552,44.875) 95.25,44.875 ccw(c95.552,44.875) 95.338,44.662 ccw(c95.729,45.052) 95.729,44.5 96,44.5 ; 95.25,46.375 95.771,46.375 cw(c95.771,45.521) 96.375,46.125 cw(c95.771,45.521) 96.625,45.521 ccw(c96.979,45.521) 96.729,45.271 ccw(c97.384,45.927) 97.384,45 97.875,45 ; 96,47 96.146,47.146 cw(c97,46.293) 97,47.5 cw(c97,46.896) 97.427,47.323 cw(c97.25,47.146) 97.5,47.146 cw(c97.146,47.146) 97.396,46.896 ccw(c97.75,46.543) 97.25,46.543 ccw(c97.354,46.543) 97.28,46.47 ccw(c97.811,47) 97.811,46.25 97.896,46.25 ccw(c97.896,47.104) 98.5,46.5 ; 15.75,2.5 15.75,4.5 13.75,4.5 13.75,0.5 15.75,0.5 15.75,2.5 ; 53.5,0.5 55.5,0.5 55.5,2.5 51.5,2.5 51.5,0.5 53.5,0.5
  lines w0.3: 91.75,49.25 92,48.25 ; 93.5,48.25 93.75,49.25
  lines w0.4: 89.5,47 cw(c92.75,43.75) 96,47 cw(c92.75,50.25) 89.5,47
Bottom Overlay:
  region: 5 vertices and 35 holes, not listed, extent 96.5,49 127.5,80
  region: 125.5,73 120.5,73 120.5,78 125.5,78 hole: 124.5,77 121.5,77 121.5,76 121.5,75 121.5,74 124.5,74 124.5,75 124.5,76
  region: 103.5,73 98.5,73 98.5,78 103.5,78 hole: 102.5,77 99.5,77 99.5,76 99.5,75 99.5,74 102.5,74 102.5,75 102.5,76
  region: 125.5,51 120.5,51 120.5,56 125.5,56 hole: 124.5,55 121.5,55 121.5,54 121.5,53 121.5,52 124.5,52 124.5,53 124.5,54
  region: 102.5,66 103.5,66 103.5,65 102.5,65 102.5,64 104.5,64 104.5,66 105.5,66 105.5,65 106.5,65 106.5,62 107.5,62 107.5,61 106.5,61 106.5,60 107.5,60 107.5,59 108.5,59 108.5,60 109.5,60 109.5,58 107.5,58 107.5,59 105.5,59 105.5,60 103.5,60 103.5,62 105.5,62 105.5,63 102.5,63 102.5,64 101.5,64 101.5,67 102.5,67
  region: 105.5,55 102.5,55 102.5,58 105.5,58 hole: 104.5,57 103.5,57 103.5,56 104.5,56
  region: 114.5,53 115.5,53 115.5,52 114.5,52 114.5,53 113.5,53 113.5,54 114.5,54
  region: 105.5,68 103.5,68 103.5,69 105.5,69
  region: 109.5,61 108.5,61 108.5,62 109.5,62
  region: 117.5,72 116.5,72 116.5,73 117.5,73
  text "Small-Scale Biofuel Production" at 105,29.5 h1.5
  text "Process Control Unit" at 104.96,21.94 h1.5
  text "Designed by: Armandas Jarusauskas" at 104.96,18.94 h1.5
  text "School of Engineering and Design" at 105,15 h1.5
  text "University of Sussex" at 105,12.5 h1.5
  text "2010/2011" at 105,7.5 h1.5
PCB Size:
  the board outline again, w0.2
Fab Notes:
  text "Board Specification" at 136,75 h5
  text "Material: FR4" at 136,68 h2
  text "Material details: standard Tg 140C" at 136,64 h2
  text "Board thickness: 1.6mm" at 136,60 h2
  text "Surface finish: ENIG" at 136,56 h2
  text "Copper weight: 35um / 1oz" at 136,52 h2
  text "Solder mask: black, both sides" at 136,48 h2
  text "Silk screen: white, both sides" at 136,44 h2

## Dimensions
0,0 to 25,20 on Mechanical
0,0 to 25,20 on Mechanical
0,0 to 0,81 on Fab Notes
0,0 to 130,0 on Fab Notes
0,0 to 113,4.5 on Mechanical
0,0 to 113,4.5 on Mechanical

## Text inside footprints (layer, text, board x,y; h text height)
J3: Top Overlay "8" at 69.5,59.25 h1; Top Overlay "4" at 69.5,56.75 h1; Top Overlay "1" at 57.75,56.75 h1; Top Overlay "5" at 57.46,59.282 h1
SD1: Top Overlay "microSD" at 87.25,70 h1.5